# Altium PCB lab3_kulikov_heat_control.PcbDoc (part 2 of 2)
Units mm, origin at the board's own origin, x right, y up, seen from the top; angles counter-clockwise.
Board outline 100 x 67.25 mm, 4 copper layers (Top Layer, Signal Layer 1, Signal Layer 2, Bottom Layer), stack 1.522 mm thick; 68 components, 52 nets, 265 pads, 1135 vias.
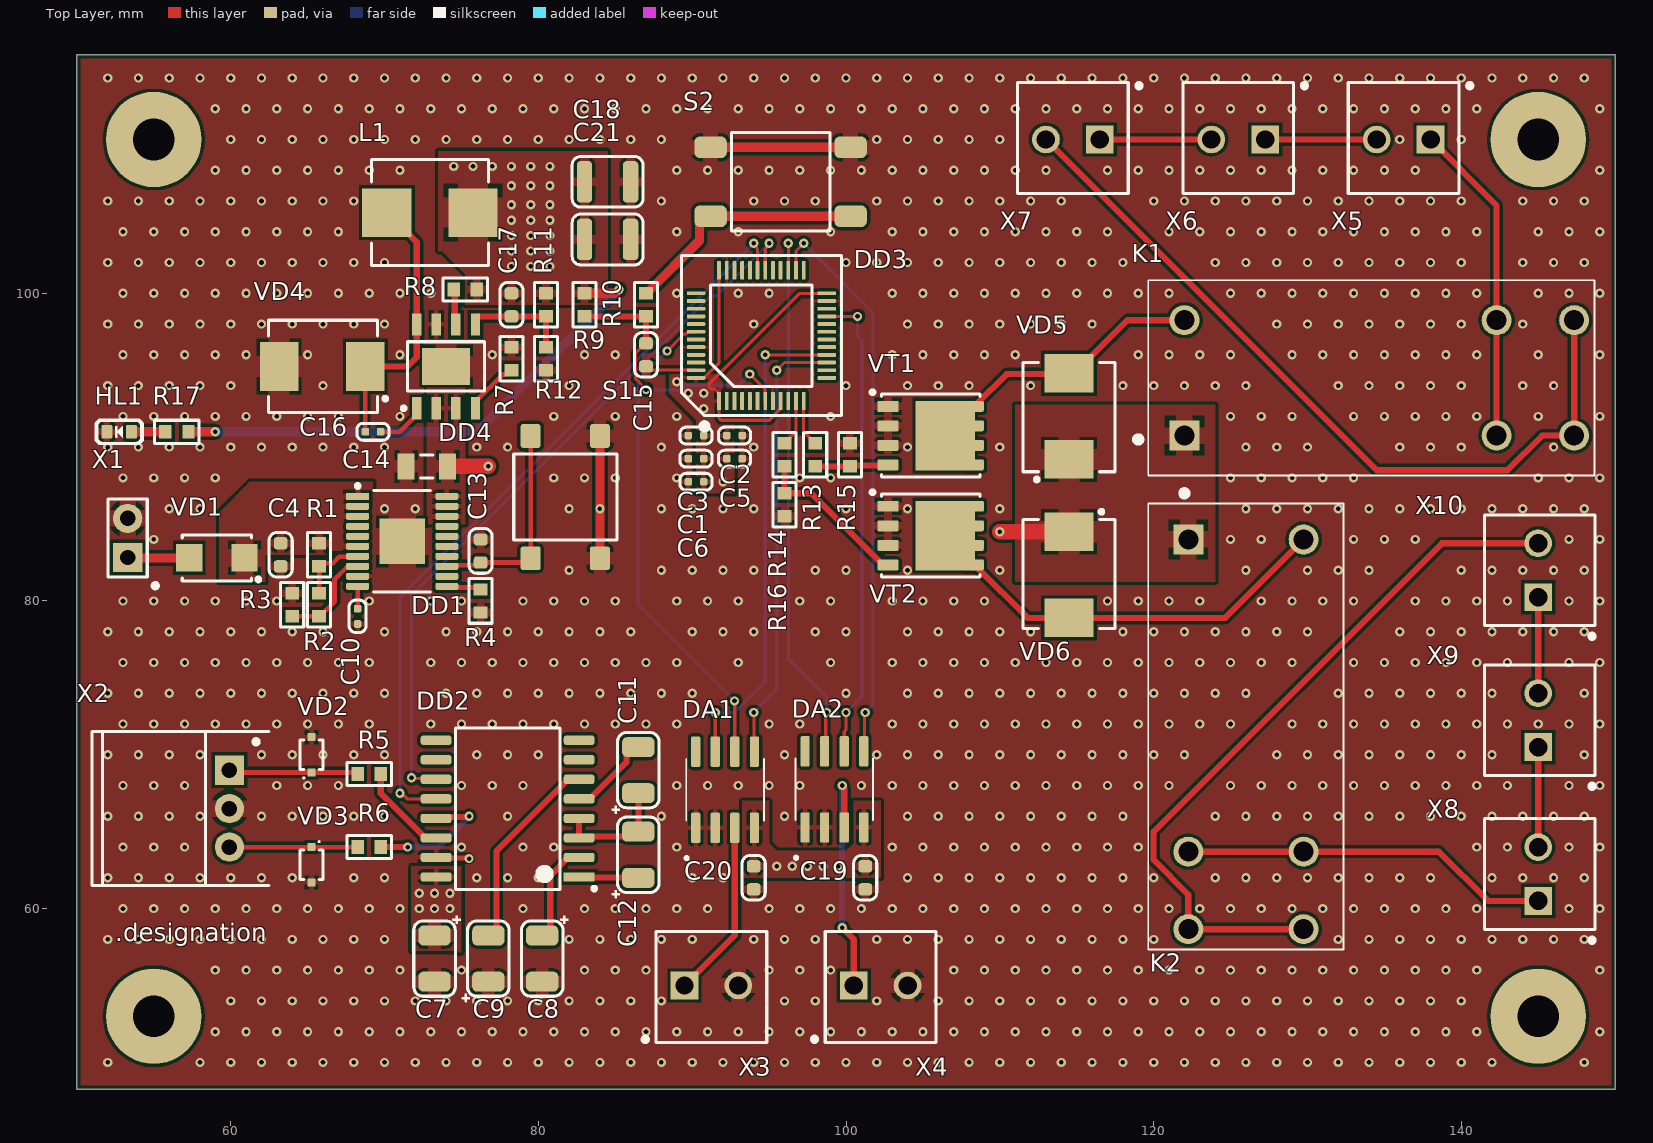
[diagram p0: Top Layer view]

## Via types
v1: diameter 0.6, hole 0.3, Top Layer to Bottom Layer, tented both sides, 1068 vias
v2: diameter 0.6, hole 0.3, Top Layer to Bottom Layer, 67 vias

## Nets (pads, with @x,y where several pads share a name; then routed paths per layer and width w, separated by ;. In a path a pad name is that pad's centre, name@x,y a point inside that pad or via, vN(x,y) a via of type N, cw(c..) or ccw(c..) an arc to the next point about the centre after c; other vN are vias at no path point) (continued)
GND: (continued)
  other v1: 52,50 58,50 60,50 62,50 64,50 66,50 68,50 70,50 72,50 74,50 76,50 78,50 80,50 82,50 84,50 86,50 88,50 90,50 92,50 94,50 96,50 98,50 100,50 102,50 104,50 106,50 108,50 110,50 112,50 114,50 116,50 118,50 120,50 122,50 124,50 126,50 128,50 130,50 132,50 134,50 136,50 138,50 140,50 142,50 148,50 59,52 61,52 63,52 65,52 67,52 69,52 71,52 73,52 75,52 77,52 79,52 81,52 83,52 85,52 87,52 89,52 91,52 93,52 95,52 97,52 99,52 101,52 103,52 105,52 107,52 109,52 111,52 113,52 115,52 117,52 119,52 121,52 123,52 125,52 127,52 129,52 131,52 133,52 135,52 137,52 139,52 141,52 149,52 60,54 62,54 64,54 66,54 68,54 70,54 72,54 74,54 76,54 78,54 80,54 82,54 84,54 86,54 88,54 96,54 98,54 102,54 106,54 108,54 110,54 112,54 114,54 116,54 118,54 120,54 122,54 124,54 126,54 128,54 130,54 132,54 134,54 136,54 138,54 140,54 59,56 61,56 63,56 65,56 67,56 69,56 71,56 75,56 83,56 85,56 87,56 95,56 97,56 99,56 107,56 109,56 111,56 113,56 115,56 117,56 119,56 121,56 123,56 125,56 127,56 129,56 131,56 133,56 135,56 137,56 139,56 141,56 149,56 52,58 54,58 56,58 58,58 60,58 62,58 64,58 66,58 68,58 70,58 82,58 84,58 86,58 88,58 90,58 94,58 96,58 98,58 102,58 104,58 106,58 108,58 110,58 112,58 114,58 116,58 118,58 120,58 132,58 134,58 136,58 138,58 140,58 142,58 144,58 146,58 148,58 53,60 55,60 57,60 59,60 61,60 63,60 65,60 67,60 69,60 71,60 79,60 83,60 85,60 87,60 89,60 91,60 95,60 97,60 99,60 101,60 103,60 105,60 107,60 109,60 111,60 113,60 115,60 117,60 119,60 121,60 123,60 125,60 127,60 129,60 131,60 133,60 135,60 137,60 139,60 141,60 147,60 149,60 52,62 54,62 56,62 58,62 60,62 62,62 64,62 68,62 70,62 76,62 78,62 80,62 90,62 92,62 104,62 106,62 108,62 110,62 112,62 114,62 116,62 118,62 120,62 124,62 126,62 128,62 130,62 132,62 134,62 136,62 138,62 142,62 144,62 146,62 148,62 53,64 55,64 57,64 75,64 79,64 81,64 89,64 103,64 105,64 107,64 109,64 111,64 113,64 115,64 117,64 119,64 141,64 143,64 147,64 149,64 52,66 54,66 56,66 58,66 62,66 64,66 66,66 68,66 70,66 78,66 88,66 96,66 104,66 106,66 108,66 110,66 112,66 114,66 116,66 118,66 124,66 126,66 128,66 130,66 132,66 134,66 136,66 138,66 140,66 142,66 144,66 146,66 148,66 53,68 55,68 57,68 63,68 65,68 67,68 75,68 77,68 79,68 89,68 91,68 93,68 95,68 97,68 101,68 103,68 105,68 107,68 109,68 111,68 113,68 115,68 117,68 119,68 121,68 125,68 127,68 129,68 131,68 133,68 135,68 137,68 139,68 141,68 143,68 147,68 149,68 52,70 54,70 56,70 58,70 62,70 64,70 66,70 68,70 70,70 76,70 78,70 80,70 96,70 102,70 104,70 106,70 108,70 110,70 112,70 114,70 116,70 118,70 120,70 122,70 128,70 130,70 132,70 134,70 136,70 138,70 140,70 142,70 148,70 53,72 55,72 57,72 59,72 61,72 63,72 65,72 67,72 69,72 73,72 75,72 77,72 79,72 81,72 83,72 85,72 87,72 89,72 95,72 97,72 103,72 105,72 107,72 109,72 111,72 113,72 115,72 117,72 119,72 121,72 123,72 125,72 129,72 131,72 133,72 135,72 137,72 139,72 141,72 143,72 145,72 147,72 149,72 52,74 54,74 56,74 58,74 60,74 62,74 64,74 66,74 68,74 70,74 74,74 76,74 78,74 80,74 82,74 84,74 86,74 88,74 90,74 100,74 104,74 106,74 108,74 110,74 112,74 114,74 116,74 118,74 120,74 122,74 124,74 126,74 132,74 134,74 136,74 138,74 140,74 142,74 148,74 53,76 55,76 57,76 59,76 61,76 63,76 65,76 67,76 69,76 73,76 75,76 77,76 79,76 81,76 83,76 85,76 87,76 89,76 93,76 99,76 103,76 105,76 107,76 109,76 111,76 113,76 115,76 117,76 119,76 121,76 123,76 125,76 127,76 129,76 133,76 135,76 137,76 139,76 141,76 143,76 147,76 149,76 52,78 54,78 56,78 58,78 60,78 62,78 64,78 66,78 70,78 74,78 76,78 78,78 80,78 82,78 84,78 86,78 90,78 92,78 94,78 98,78 100,78 104,78 106,78 108,78 110,78 112,78 118,78 120,78 122,78 124,78 126,78 128,78 130,78 136,78 138,78 140,78 142,78 144,78 146,78 148,78 53,80 55,80 57,80 59,80 61,80 63,80 69,80 73,80 75,80 79,80 81,80 83,80 85,80 89,80 91,80 93,80 97,80 99,80 103,80 105,80 107,80 109,80 117,80 119,80 121,80 123,80 127,80 129,80 131,80 133,80 137,80 139,80 141,80 143,80 147,80 149,80 82,82 88,82 90,82 92,82 94,82 98,82 100,82 104,82 110,82 126,82 130,82 132,82 134,82 140,82 142,82 144,82 146,82 148,82 55,84 125,84 127,84 133,84 135,84 137,84 147,84 149,84 56,86 58,86 70,86 72,86 82,86 84,86 88,86 90,86 92,86 94,86 100,86 104,86 110,86 126,86 128,86 130,86 132,86 134,86 136,86 138,86 140,86 142,86 144,86 146,86 148,86 53,88 55,88 57,88 59,88 81,88 83,88 85,88 89,88 97,88 99,88 125,88 127,88 129,88 131,88 133,88 145,88 147,88 149,88 52,90 54,90 56,90 58,90 60,90 62,90 64,90 66,90 68,90 70,90 76,90 78,90 88,90 94,90 104,90 110,90 126,90 128,90 130,90 136,90 138,90 140,90 146,90 53,92 55,92 57,92 59,92 61,92 63,92 65,92 67,92 71,92 81,92 85,92 89,92 99,92 125,92 127,92 129,92 133,92 135,92 137,92 139,92 141,92 145,92 149,92 52,94 54,94 56,94 58,94 60,94 66,94 82,94 100,94 104,94 106,94 108,94 112,94 118,94 120,94 122,94 124,94 126,94 132,94 134,94 136,94 138,94 140,94 144,94 146,94 53,96 55,96 57,96 59,96 61,96 65,96 71,96 77,96 83,96 85,96 103,96 105,96 107,96 109,96 111,96 119,96 121,96 123,96 125,96 129,96 131,96 133,96 135,96 137,96 139,96 141,96 145,96 149,96 52,98 54,98 56,98 58,98 60,98 62,98 64,98 66,98 68,98 70,98 94,98 104,98 106,98 108,98 110,98 112,98 114,98 116,98 128,98 130,98 132,98 134,98 136,98 138,98 140,98 144,98 53,100 55,100 57,100 59,100 61,100 63,100 65,100 67,100 69,100 71,100 73,100 89,100 93,100 95,100 103,100 105,100 107,100 109,100 111,100 113,100 115,100 117,100 119,100 121,100 125,100 127,100 129,100 131,100 133,100 135,100 137,100 139,100 141,100 145,100 147,100 149,100 52,102 54,102 56,102 58,102 60,102 62,102 64,102 66,102 68,102 70,102 100,102 102,102 104,102 106,102 108,102 110,102 112,102 114,102 116,102 118,102 124,102 126,102 128,102 130,102 132,102 134,102 136,102 138,102 140,102 144,102 146,102 148,102 53,104 55,104 57,104 59,104 61,104 63,104 65,104 67,104 89,104 93,104 99,104 103,104 105,104 107,104 109,104 111,104 113,104 115,104 117,104 121,104 123,104 125,104 127,104 129,104 131,104 133,104 135,104 137,104 139,104 141,104 145,104 147,104 149,104 52,106 54,106 56,106 58,106 60,106 62,106 64,106 66,106 68,106 88,106 94,106 96,106 98,106 102,106 104,106 106,106 108,106 110,106 112,106 114,106 120,106 122,106 124,106 126,106 128,106 130,106 132,106 134,106 136,106 138,106 140,106 144,106 146,106 148,106 59,108 61,108 63,108 65,108 67,108 69,108 71,108 89,108 91,108 93,108 95,108 97,108 99,108 101,108 103,108 105,108 107,108 109,108 111,108 113,108 117,108 119,108 121,108 123,108 125,108 127,108 129,108 131,108 133,108 135,108 137,108 149,108 60,110 62,110 64,110 66,110 68,110 70,110 72,110 74,110 76,110 78,110 80,110 82,110 84,110 86,110 88,110 102,110 104,110 106,110 108,110 110,110 136,110 140,110 59,112 61,112 63,112 65,112 67,112 69,112 71,112 73,112 75,112 77,112 79,112 81,112 83,112 85,112 87,112 89,112 91,112 93,112 95,112 97,112 99,112 101,112 103,112 105,112 107,112 109,112 111,112 113,112 115,112 117,112 119,112 121,112 123,112 125,112 127,112 129,112 131,112 133,112 135,112 137,112 139,112 141,112 149,112 52,114 54,114 56,114 58,114 60,114 62,114 64,114 66,114 68,114 70,114 72,114 74,114 76,114 78,114 80,114 82,114 84,114 86,114 88,114 90,114 92,114 94,114 96,114 98,114 100,114 102,114 104,114 106,114 108,114 110,114 112,114 114,114 116,114 118,114 120,114 122,114 124,114 126,114 128,114 130,114 132,114 134,114 136,114 138,114 140,114 142,114 144,114 146,114 148,114
MCU_COOLER: DD3.12 R13.1 | length 3.1
  Top Layer w0.2: DD3.12 97.25,91 97.65,90.6 97.65,90.55 97.95,90.25 R13.1
MCU_HEAT: DD3.11 R14.1 | length 3.1
  Top Layer w0.2: R14.1 96.05,90.25 96.35,90.55 96.35,90.6 96.75,91 DD3.11
MCU_SENSOR1_C\S\: DA1.6 DD3.42 | length 31.8
  Top Layer w0.2: v2(88.372,96.25) 89.472,97.35 89.625,97.35 89.775,97.5 DD3.42 ; v2(92.75,73.5) 92.77,73.48 DA1.6
  Bottom Layer w0.2: v2(88.372,96.25) 86.475,94.353 86.475,79.775 v2(92.75,73.5)
MCU_SENSOR1_SCK: DA1.5 DD3.15 | length 28.9
  Top Layer w0.2: v2(94,72.75) 94.02,72.73 94.02,70.22 DA1.5 ; v2(95.5,95) 96,95.5 DD3.15
  Bottom Layer w0.2: v2(94,72.75) 95.5,74.25 v2(95.5,95)
MCU_SENSOR1_SO: DA1.7 DD3.16 | length 31.9
  Top Layer w0.2: DA1.7 v2(91.5,72.75) ; v2(94.75,96) DD3.16
  Bottom Layer w0.2: v2(91.5,72.75) 92.742,72.75 94.75,74.758 v2(94.75,96)
MCU_SENSOR2_C\S\: DA2.6 DD3.21 | length 30.9
  Top Layer w0.2: DD3.21 v2(100.75,98.5) ; DA2.6 99.885,71.51 100,71.625 v2(100,72.75)
  Bottom Layer w0.2: v2(100,72.75) 101.025,73.775 101.025,96.95 100.75,97.225 v2(100.75,98.5)
MCU_SENSOR2_SCK: DA2.5 DD3.26 | length 37.1
  Top Layer w0.2: DD3.26 96.75,102.75 v2(97.25,103.25) ; DA2.5 101.203,70.272 101.203,72.702 v2(101.25,72.75)
  Bottom Layer w0.2: v2(97.25,103.25) 101.75,98.75 101.75,73.25 v2(101.25,72.75)
MCU_SENSOR2_SO: DA2.7 DD3.27 | length 35.9
  Top Layer w0.2: DD3.27 v2(96.25,103.25) ; DA2.7 98.683,70.292 98.683,72.682 v2(98.75,72.75)
  Bottom Layer w0.2: v2(96.25,103.25) 96.25,76.25 98.75,73.75 v2(98.75,72.75)
NetC8_1: C8.1 DD2.2 | length 6.5
  Top Layer w0.4: C8.1 80.335,58.25 80.775,58.69 80.775,62.15 81.95,63.325 DD2.2
NetC9_2: C9.2 DD2.6 | length 13.1
  Top Layer w0.4: C9.2 76.835,58.25 77.275,58.69 77.275,63.73 81.95,68.405 DD2.6
NetC10_1: C10.1 DD1.10 | length 1.5
  Top Layer w0.3: C10.1 DD1.10
NetC11_1: C11.1 C12.2 DD2.3 DD2.4 | length 7.8
  Top Layer w0.4: DD2.4 DD2.3 82.75,64.695 86.195,64.695 C12.2 C11.1
NetC11_2: C11.2 DD2.5 | length 5.6
  Top Layer w0.4: DD2.5 83.35,67.135 85.727,69.512 85.727,70.06 86.168,70.5 C11.2
NetC12_1: C12.1 DD2.1 | length 3.9
  Top Layer w0.4: DD2.1 82.677,62.028 86.472,62.028 C12.1
NetC13_1: C13.1 DD1.13 S1.2 | length 13.6
  Top Layer w0.3: DD1.13 74.125,82.325 76.075,82.325 C13.1 79.225,82.5 79.5,82.775 S1.2@79.5,90.725
NetDA1_3: DA1.3 X3.1 | length 11.6
  Top Layer w0.4: X3.1 92.77,58.27 DA1.3
NetDA2_3: DA2.3 X4.1 | length 16.1
  Top Layer w0.4: v2(99.75,58.75) 100.5,58 X4.1 ; v2(99.75,68) 99.75,67.946 99.885,67.811 DA2.3
  Bottom Layer w0.4: v2(99.75,58.75) v2(99.75,68)
NetDD1_7: DD1.7 R1.1 R2.2 | length 4.5
  Top Layer w0.3: R2.2 R1.1 65.963,82.462 66.65,82.462 67.05,82.862 68.212,82.862 DD1.7
NetDD1_8: DD1.8 R2.1 R3.2 | length 6.4
  Top Layer w0.3: R3.2 R2.1 65.8,79 66.751,79.951 66.751,81.399 67.527,82.175 68.175,82.175 DD1.8
NetDD1_11: DD1.11 R4.2 | length 2.3
  Top Layer w0.3: DD1.11 74.125,80.875 76.125,80.875 R4.2
NetDD4_4: DD4.4 R7.2 | length 3.6
  Top Layer w0.3: DD4.4 75.905,92.95 77.705,94.75 78,94.75 R7.2
NetDD4_6: DD4.6 R8.1 | length 2.3
  Top Layer w0.3: R8.1 R8.1@74.567,100.182 ; DD4.6@74.567,98.042 DD4.6
  Top Layer w0.4: DD4.6@74.567,98.042 R8.1@74.567,100.182
NetHL1_2: HL1.2 R17.1 | length 2.2
  Top Layer w0.6: HL1.2 R17.1
NetK1_11: K1.11 K1.11-1 X5.1 | length 21
  Top Layer w0.4: X5.1 142.3,105.7 K1.11-1 K1.11
NetK1_14: K1.14 K1.14-1 X7.2 | length 51.7
  Top Layer w0.4: X7.2 134.5,88.5 143,88.5 145.25,90.75 K1.14 K1.14-1
NetK1_A2: K1.A2 VD5.2 VT1.D | length 18.9
  Top Layer w0.4: VT1.D@106.45,90.75 106.45,91.085 108.175,92.81 108.51,92.81 110.45,94.75 114.45,94.75 VD5.2 114.85,94.8 118.3,98.25 K1.A2
NetK2_11: K2.11 K2.11-1 X8.1 | length 24.1
  Top Layer w0.4: K2.11 K2.11-1 138.55,63.7 141.75,60.5 X8.1
NetK2_14: K2.14 K2.14-1 X10.2 | length 47.5
  Top Layer w0.4: K2.14-1 K2.14 122.25,60.915 120,63.165 120,65 138.75,83.75 X10.2
NetK2_A2: K2.A2 VD6.2 VT2.D | length 27.8
  Top Layer w0.4: VT2.D@106.45,84.25 106.45,83.915 108.175,82.19 108.51,82.19 111.8,78.9 VD6.2 124.65,78.9 K2.A2
NetR5_2: R5.2 VD2.1 X2.1 | length 8.4
  Top Layer w0.3: X2.1 60.063,68.85 VD2.1 68.15,68.85 R5.2
NetR6_2: R6.2 VD3.1 X2.3 | length 8.3
  Top Layer w0.3: X2.3 VD3.1 R6.2
NetR10_2: R10.2 S2.1 | length 16.1
  Top Layer w0.6: R10.2 87.05,100 90.481,103.431 90.481,104.614 90.877,105.01 91.2,105.01 S2.1@100.3,105.01
NetR13_2: R13.2 R15.2 VT1.G | length 4.8
  Top Layer w0.4: R13.2 R15.2 100.298,88.797 102.682,88.797 VT1.G
NetR14_2: R14.2 R16.2 VT2.G | length 10.4
  Top Layer w0.4: R16.2 97.75,87 99.997,84.753 99.997,84.747 102.399,82.345 VT2.G ; R16.2 R14.2
NetVD1_2: VD1.2 X1.1 | length 4
  Top Layer w0.6: X1.1 53.325,82.8 VD1.2
NetX5_2: X5.2 X6.1 | length 7.2
  Top Layer w0.4: X6.1 X5.2
NetX6_2: X6.2 X7.1 | length 7.3
  Top Layer w0.4: X7.1 X6.2
NetX8_2: X8.2 X9.1 | length 6.5
  Top Layer w0.4: X8.2 X9.1
NetX9_2: X9.2 X10.1 | length 6.3
  Top Layer w0.4: X9.2 X10.1
R\S\T\: C15.1 DD3.7 R9.1 R10.1 | length 18.7
  Top Layer w0.2: v2(87,93.75) 86.325,94.425 86.325,96.125 86.95,96.75 C15.1 ; v2(93.75,94.75) 94.725,93.775 94.725,93.025 DD3.7
  Top Layer w0.4: R9.1 R10.1 C15.1
  Bottom Layer w0.2: v2(87,93.75) 87.025,93.725 89.233,93.725 89.533,94.025 93.025,94.025 v2(93.75,94.75)
RS232_RX: DD2.13 R6.1 | length 8.8
  Top Layer w0.4: R6.1 v2(71.5,64) ; DD2.13 73.447,65.962 75.462,65.962 v2(75.5,66)
  Bottom Layer w0.4: v2(71.5,64) 73.5,64 v2(75.5,66)
RS232_TX: DD2.14 R5.1 | length 6.1
  Top Layer w0.4: R5.1 69.75,67.495 72.65,64.595 DD2.14
SW: C16.1 DD4.8 L1.1 VD4.1 | length 18.1
  Top Layer w0.3: C16.1 VD4.1
  Top Layer w0.4: VD4.1 71.5,95.25 72.095,95.845 DD4.8 72.095,103.33 70.175,105.25 L1.1
USART_RX: DD2.12 DD3.31 | length 49.6
  Top Layer w0.2: v2(71,67.5) 71.108,67.5 71.473,67.135 DD2.12 ; v2(94,103.25) 94,103.142 94.25,102.892 DD3.31
  Bottom Layer w0.2: v2(71,67.5) 71,80.25 v2(94,103.25)
USART_TX: DD2.11 DD3.30 | length 48.1
  Top Layer w0.2: v2(71.75,68.5) 71.797,68.452 73.303,68.452 DD2.11 ; DD3.30 94.75,102.892 95,103.142 v2(95,103.25)
  Bottom Layer w0.2: v2(71.75,68.5) 71.75,80.371 91.2,99.82 91.57,99.82 v2(95,103.25)
pads on no net: DA1.8 DA2.8 DD1.4 DD1.5 DD1.12 DD1.14 DD1.15 DD1.16 DD1.17 DD2.7 DD2.8 DD2.9 DD2.10 DD3.2 DD3.3 DD3.4 DD3.5 DD3.6 DD3.10 DD3.13 DD3.14 DD3.17 DD3.18 DD3.19 DD3.20 DD3.22 DD3.25 DD3.28 DD3.29 DD3.32 DD3.33 DD3.34 DD3.37 DD3.38 DD3.39 DD3.40 DD3.41 DD3.43 DD3.45 DD3.46

## Polygon pours and split planes (outlines as drawn)
GND on Top Layer (solid, pour order 42): 44.75,121 47.25,118.5 153.75,118.5 153.75,51.25 148.5,46 47.5,46
+3,3V on Top Layer (solid, pour order 8): 88.5,94.75 91.5,94.75 92,94.25 92,92.25 92.75,91.5 92.75,87 90.25,87 90.25,91.75 88.5,93.5
+3,3V on Top Layer (solid, pour order 6): 73.5,109.25 73.5,102.75 73.75,102.75 75.25,101.25 75.25,99.25 84.5,99.25 84.5,109.25
+24V_IN on Top Layer (solid, pour order 20): 59.25,81.25 62.25,81.25 62.25,83 66.25,83 66.5,83.25 69.25,83.25 69.25,87.75 61.25,87.75 59.25,85.75
+3,3V on Top Layer (solid, pour order 18): 71.75,62.75 75,62.75 75,57 74.75,57.25 71.75,57.25
NetK2_A2 on Top Layer (solid, pour order 14): 108,88
+3,3V on Top Layer (solid, pour order 10): 93,62 102.25,62 102.25,67 100.5,67 100.5,64.25 100,63.75 95.5,63.75 95,64.25 95,67 93.25,67 93.25,62.25
+24V_IN_PROT on Top Layer (solid, pour order 4): 72.75,94 75.25,94 75.25,85 72.75,85
+24V_IN_PROT on Top Layer (solid, pour order 2): 111,92.75 124,92.75 124,81.25 111,81.25
GND on Signal Layer 2 (solid, pour order 38): 45.75,118.5 156.25,118.5 157,117.75 154.75,115.5 154.75,43.5 47.25,43.5 46,44.75
GND on Bottom Layer (solid, pour order 40): 48,116.5 152.25,116.5 152.25,46.5 151.75,46 151.5,46.25 48.25,46.25
+3,3V on Signal Layer 1 (solid, pour order 44): 46.5,120 154.75,120 156.5,118.25 154.75,116.5 154.75,43.25 46,43.25 44.5,44.75

## Silkscreen, mask and mechanical layers (free items; w line width, h text height)
Top Overlay:
  text ".designation" at 52.5,57.5 h2
Bottom Overlay:
  text ".pcb_dec_number" at 68.5,57.5 h2
Assembly Notes (Mech5):
  text "'.title'" at 50,44.5 h2
  text "'.project'_'.pcb_dec_number'['.Pcb_File_Name_No_Path']" at 50,42 h2
Bottom Designator:
  the board outline again, w0.254